# Altium PCB KNoT-Gateway Mini Starter Board.PcbDoc
Units mm, origin at the board's own origin, x right, y up, seen from the top; angles counter-clockwise.
Board outline 45.72 x 20.32 mm, 2 copper layers (Top Layer, Bottom Layer), stack 1.571 mm thick; 14 components, 16 nets, 52 pads, 8 vias.
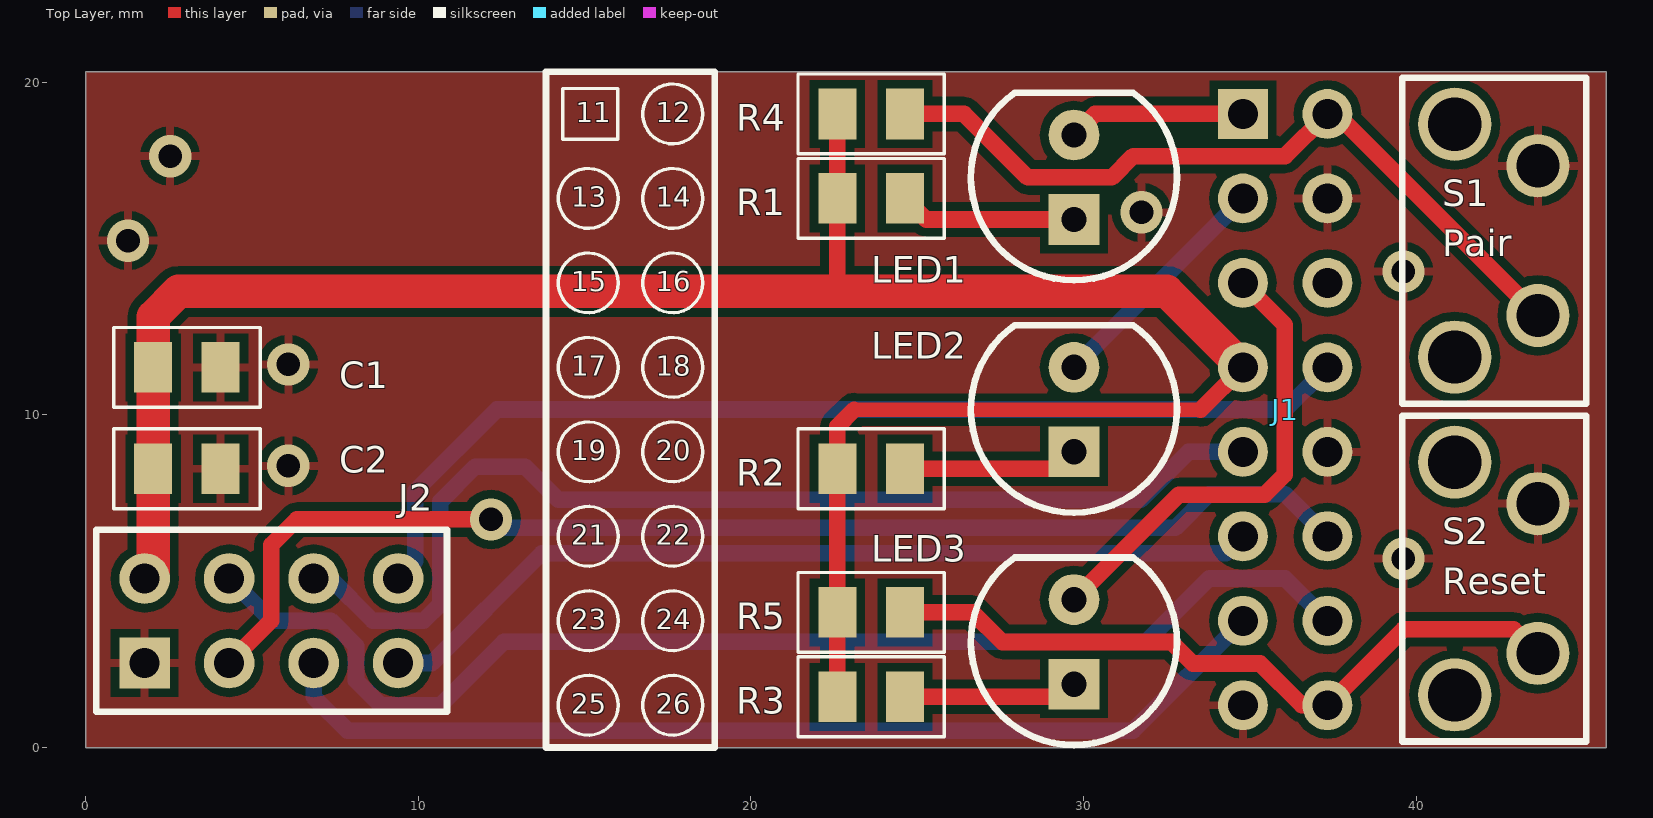
[diagram p0: Top Layer view]
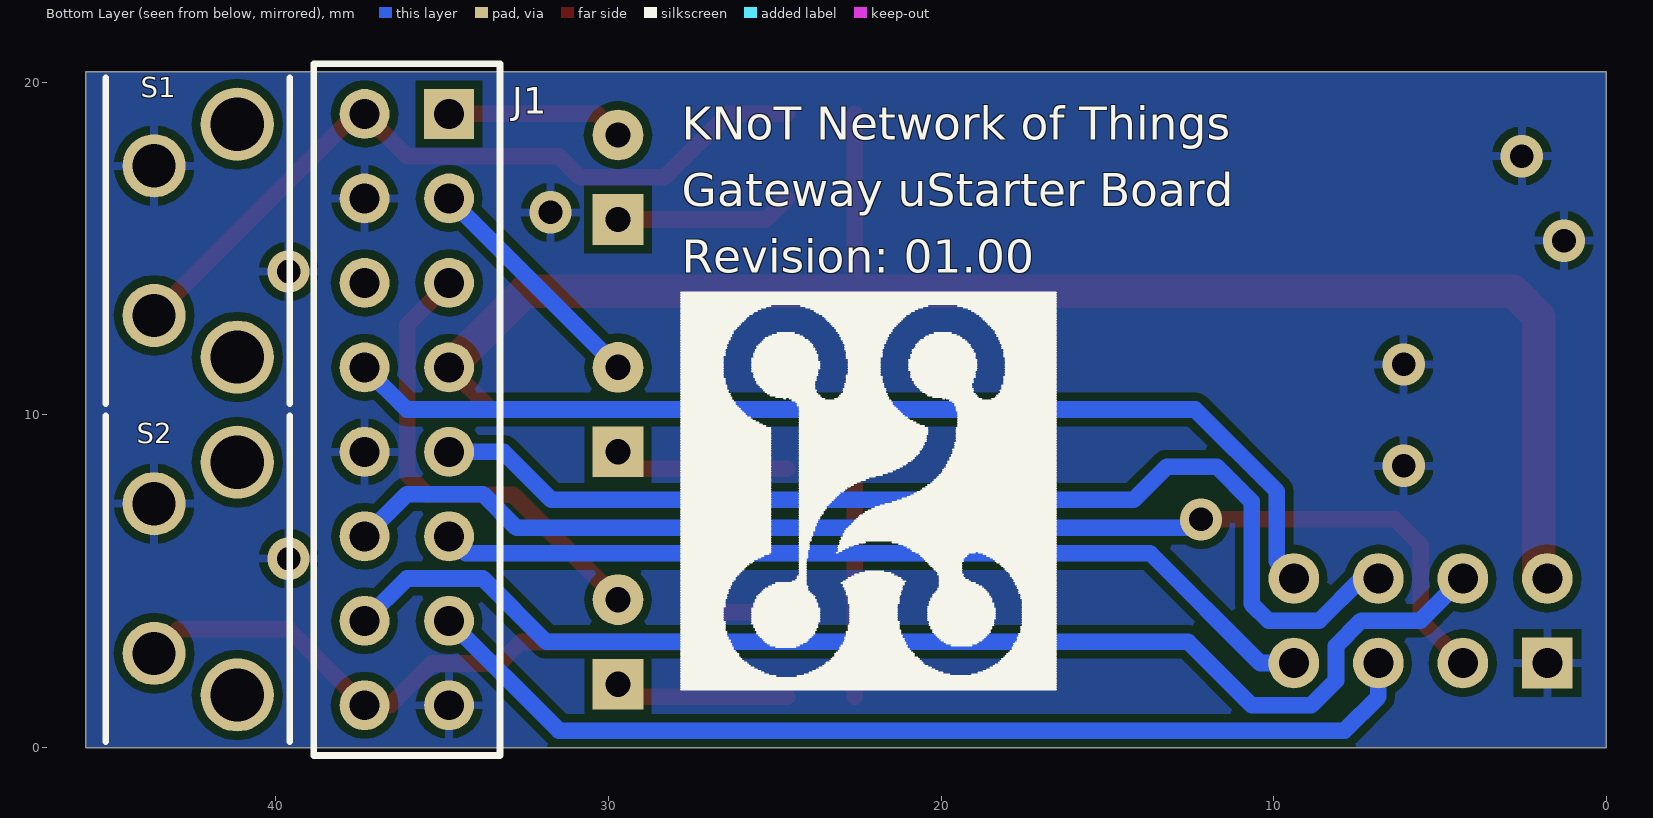
[diagram p1: Bottom Layer view, seen from below]

## Layer stack, top to bottom
Top Solder: solder mask 0.0102, Solder Resist, Dk 3.5
Top Layer: signal copper 0.0356
Dielectric 1: dielectric 1.5, FR-4, Dk 4.8
Bottom Layer: signal copper 0.0356
Bottom Solder: solder mask 0.0102, Solder Resist, Dk 3.5

## Board outline
0,0 0,20.32 45.72,20.32 45.72,0

## Design rules (kind name [scope] priority, off if disabled: settings)
Clearance [All] p1: gap=0.254
Clearance Clearance_1 [All vs (InNamedPolygon('Top Layer-GND'))] p2: gap=0.4
PolygonConnect [All] p1: connectstyle=Relief reliefconductorwidth=0.254 reliefentries=4 polygonreliefangle="90 Angle" airgapwidth=0.254
RoutingVias [All] p1: holewidth=0.711 width=1.27 viastyle="Through Hole" minholewidth=0.711 minwidth=1.27 maxholewidth=0.711 maxwidth=1.27
SMDNeckDown [All] p1: percent=90.000
SilkToSilkClearance [All] p1: silktosilkclearance=0.1
SolderMaskExpansion [All] p1: expansion=0.102
Width Width_Power [InNetClass('Power')] p1: maxlimit=1 minlimit=0.4 preferedwidth=0.5 minimp=50.000000 maximp=50.000000 favimp=50.000000
Width [All] p2: maxlimit=0.5 minlimit=0.254 preferedwidth=0.254 minimp=50.000000 maximp=50.000000 favimp=50.000000
28 further rules are at their usual default settings.

## Classes and differential pairs
net class Power: 3V3 GND

## Components (designator, comment, footprint, x,y, rotation, side; value= is the part's Value field where it differs from the comment)
C1 "Cap 0805 0.1uF" 0805_CAPS 3.044,11.43 r0 top
C2 "Cap 0805 10uF" 0805_CAPS 3.044,8.382 r0 top
J1 "Female 2x8 header" "FEMALE HEADER 2X8" 36.064,10.16 r270 top
J2 "2x4 Female Header" nRF24L01+PA+LNA 5.584,3.81 r180 top
LED1 "LED RADIAL 5MM RED" "LED RADIAL 5MM RED" 29.714,15.875 r90 top
LED2 "LED RADIAL 5MM GREEN" "LED RADIAL 5MM GREEN" 29.714,8.89 r90 top
LED3 "LED RADIAL 5MM GREEN" "LED RADIAL 5MM GREEN" 29.714,1.905 r90 top
R1 "RES_0805" 0805_RES 23.618,16.51 r180 top
R2 "RES_0805" 0805_RES 23.618,8.382 r180 top
R3 "RES_0805" 0805_RES 23.618,1.524 r180 top
R4 "RES_0805" 0805_RES 23.618,19.05 r180 top
R5 "RES_0805" 0805_RES 23.618,4.064 r180 top
S1 "Push Button - Long" "Tac Push Button L" 42.414,15.24 r270 bottom
S2 "Push Button - Short" "Tac Push Button S" 42.414,5.08 r270 bottom

## Footprints (in the part's own frame and the unit in brackets; to place one, negate y for a bottom-side part, rotate by r counter-clockwise, add the part's x,y. Pads: shape width x height; smd on the part's side, far side on the other; paste and mask are expansions set on the pad)
0805_CAPS [mil] "08'' x 05'' Passive Surface Mounted Device"
  rect 45x60 smd: 1(-40,0) 2(40,0)
  silkscreen extent -87,-47 87,47, body extent -39,-25 39,25, height 39
0805_RES [mil] "08'' x 05'' Passive Surface Mounted Device"
  rect 45x60 smd: 1(-40,0) 2(40,0)
  silkscreen extent -87,-47 87,47, body extent -45,-27 45,27, height 30
"FEMALE HEADER 2X8" [mm] "Female Header Bottom Connector 2x8"
  rect 1.5x1.5 hole 0.9: 1(-8.89,-1.27)
  round 1.5 hole 0.9: 2(-8.89,1.27) 3(-6.35,-1.27) 4(-6.35,1.27) 5(-3.81,-1.27) 6(-3.81,1.27) 7(-1.27,-1.27) 8(-1.27,1.27) 9(1.27,-1.27) 10(1.27,1.27) 11(3.81,-1.27) 12(3.81,1.27) 13(6.35,-1.27) 14(6.35,1.27) 15(8.89,-1.27) 16(8.89,1.27)
  body extent -10.16,-2.54 10.16,2.54, height 3.05
"LED RADIAL 5MM GREEN" [mil] "LED RADIAL 5MM THROUGH HOLE 100 MILS PITCH"
  rect 60x60 hole 30: 1(0,0)
  round 60 hole 30: 2(100,0)
  silkscreen extent -72,-122 150,122, body extent -68,-118 148,118, height 352
"LED RADIAL 5MM RED" [mil] "LED RADIAL 5MM THROUGH HOLE 100 MILS PITCH"
  rect 60x60 hole 30: 1(0,0)
  round 60 hole 30: 2(100,0)
  silkscreen extent -72,-122 150,122, body extent -68,-118 148,118, height 352
nRF24L01+PA+LNA [mil] "nRF24L01+PA+LNA MODULE"
  rect 60x60 hole 35.43: 1(150,50)
  round 60 hole 35.43: 2(150,-50) 3(50,50) 4(50,-50) 5(-50,50) 6(-50,-50) 7(-150,50) 8(-150,-50)
  silkscreen extent -208,-108 207,108, body extent -301,-2439 292,125
"Tac Push Button L" [mm] "Panasonic Small Tac Push Button 8.35mm"
  round 2.2 hole 1.6: 0(-3.5,1.25) 0(3.5,1.25)
  round 1.9 hole 1.3: 1(-2.25,-1.25) 2(2.25,-1.25)
  silkscreen extent -4.9,-2.7 4.9,2.83, body extent -4.06,-9.38 4.04,2.27, height 7.31
"Tac Push Button S" [mm] "Panasonic Small Tac Push Button 5.85mm"
  round 2.2 hole 1.6: 0(-3.5,1.25) 0(3.5,1.25)
  round 1.9 hole 1.3: 1(-2.25,-1.25) 2(2.25,-1.25)
  silkscreen extent -4.9,-2.7 4.9,2.83, body extent -3.94,-6.99 4.16,2.16, height 7.31

## Part data
C1: library part Cap_0805_0.1uF, "0.1µF  Ceramic Capacitor 0805"
C2: library part Cap_0805_10uF, "10uF Ceramic Capacitor 0805"
J1: library part "2x8 RPi Header", "Female Bottom 2x4 Header"
J2: library part nRF24L01+, "nRF24L01 2x4 HEADER"
LED1 LED2 LED3: "LED RADIAL"
R1 R2 R3 R4 R5: "Precision Thick Film Chip Resistor, 10 Ohm to 1M Ohm Range, 1% and 0.5% Tolerance, 0805 Size, 1/8 W"
S1: library part "Push Button L", "Tactile Push Button Right Angle"
S2: library part "Push Button S", "Tactile Push Button Right Angle"

## Via types
v1: diameter 1.27, hole 0.711, Top Layer to Bottom Layer, 8 vias

## Nets (pads, with @x,y where several pads share a name; then routed paths per layer and width w, separated by ;. In a path a pad name is that pad's centre, name@x,y a point inside that pad or via, vN(x,y) a via of type N, cw(c..) or ccw(c..) an arc to the next point about the centre after c; other vN are vias at no path point)
3V3: C1.1 C2.1 J1.7 J2.2 R1.2 R2.2 R3.2 R4.2 R5.2 | length 68.4
  Top Layer w0.45: 23.105,10.155 33.519,10.155
  Top Layer w0.5: R3.2 R5.2 22.602,9.652 23.105,10.155 ; 22.602,13.716 R1.2 R4.2 ; 33.519,10.155 J1.7
  Top Layer w1: J2.2 2.028,5.334 C2.1 C1.1 2.028,12.954 2.79,13.716 22.602,13.716 32.508,13.716 J1.7
GND: C1.2 C2.2 J1.4 J1.10 J1.15 J2.1 S1.1 S2.1
  other v1: 39.62,5.676 6.092,8.47 6.092,11.518 39.62,14.312 1.27,15.24 31.746,16.09 2.54,17.78
LED1: J1.1 LED1.2 | length 5.3
  Top Layer w0.5: LED1.2 30.349,19.05 J1.1
LED2: J1.3 LED2.2 | length 7.2
  Bottom Layer w0.5: LED2.2 J1.3
LED3: J1.5 LED3.2 | length 14.2
  Top Layer w0.5: LED3.2 32.873,7.604 35.451,7.604 36.048,8.2 36.048,12.716 J1.5
NetLED1_1: LED1.1 R1.1 | length 5.3
  Top Layer w0.5: R1.1 25.269,15.875 LED1.1
NetLED2_1: LED2.1 R2.1 | length 5.3
  Top Layer w0.5: R2.1 29.206,8.382 LED2.1
NetLED3_1: LED3.1 R3.1 | length 5.2
  Top Layer w0.5: R3.1 29.333,1.524 LED3.1
NRF_CE: J1.12 J2.3 | length 37.2
  Top Layer w0.5: J2.3 4.314,2.548 5.58,3.814 5.58,6.092 6.346,6.858 v1(12.188,6.858)
  Bottom Layer w0.5: v1(12.188,6.858) 12.442,6.604 32.762,6.604 33.778,7.62 36.064,7.62 J1.12
NRF_CLK: J1.13 J2.5 | length 30.7
  Bottom Layer w0.5: J2.5 6.854,1.524 7.87,0.508 31.492,0.508 J1.13
NRF_CSN: J1.14 J2.4 | length 37.3
  Bottom Layer w0.5: J2.4 4.322,5.08 5.588,3.814 7.37,3.814 8.128,3.056 8.128,2.016 8.869,1.274 9.39,1.274 9.394,1.27 10.664,1.27 12.573,3.179 31.877,3.179 33.778,5.08 36.064,5.08 J1.14
NRF_IRQ: J1.8 J2.8 | length 31.8
  Bottom Layer w0.5: J2.8 9.91,5.596 9.91,7.707 12.366,10.164 36.068,10.164 J1.8
NRF_MISO: J1.11 J2.7 | length 27
  Bottom Layer w0.5: J2.7 10.41,2.54 13.712,5.842 34.286,5.842 J1.11
NRF_MOSI: J1.9 J2.6 | length 33.2
  Bottom Layer w0.5: J2.6 7.362,5.08 8.632,3.81 10.156,3.81 10.664,4.318 10.664,7.395 11.714,8.445 13.214,8.445 14.214,7.445 31.714,7.445 33.159,8.89 J1.9
SW_PAIR: J1.2 R4.1 S1.2 | length 23.1
  Top Layer w0.5: R4.1 26.412,19.05 28.321,17.141 30.853,17.141 31.492,17.78 36.064,17.78 J1.2 37.604,19.05 S1.2
SW_RESET: J1.16 R5.1 S2.2 | length 21.4
  Top Layer w0.5: R5.1 26.666,4.064 27.559,3.171 32.639,3.171 33.286,2.524 35.313,2.524 36.567,1.27 J1.16 39.62,3.556 42.938,3.556 S2.2
pads on no net: J1.6 S1.0 S2.0

## Polygon pours and split planes (outlines as drawn)
GND on Top Layer "Top Layer-GND" (solid, pour order 4): 0,20.32 0,0 45.72,0 45.72,20.32
GND on Bottom Layer "Bot Layer-GND" (solid, pour order 3): 0,20.32 0,0 45.72,0 45.72,20.32

## Other copper
Top Layer:
  text "Layer Name:" at 10,-3 h0.8
  text ".Layer_Name" at 20,-3 h0.8
  text "Revision:" at 10,-5 h0.8
  text ".Revision" at 20,-5 h0.8
  text "Print Date:" at 10,-7 h0.8
  text ".Print_Date" at 20,-7 h0.8
Bottom Layer:
  text "Layer Name:" at 10,-3 h0.8
  text ".Layer_Name" at 20,-3 h0.8
  text "Revision:" at 10,-5 h0.8
  text ".Revision" at 20,-5 h0.8
  text "Print Date:" at 10,-7 h0.8
  text ".Print_Date" at 20,-7 h0.8

## Silkscreen, mask and mechanical layers (free items; w line width, h text height)
Top Overlay:
  circle w0.1: c17.649,19.05 r0.9
  circle w0.1: c17.649,16.51 r0.9
  circle w0.1: c15.109,16.51 r0.9
  circle w0.1: c15.109,13.97 r0.9
  circle w0.1: c15.109,11.43 r0.9
  circle w0.1: c15.109,8.89 r0.9
  circle w0.1: c15.109,6.35 r0.9
  circle w0.1: c15.109,1.27 r0.9
  circle w0.1: c15.109,3.81 r0.9
  circle w0.1: c17.649,1.27 r0.9
  circle w0.1: c17.649,3.81 r0.9
  circle w0.1: c17.649,6.35 r0.9
  circle w0.1: c17.649,8.89 r0.9
  circle w0.1: c17.649,11.43 r0.9
  circle w0.1: c17.649,13.97 r0.9
  lines w0.1: 14.347,18.288 14.347,18.415 14.347,19.685 14.347,19.812 15.998,19.812 15.998,19.685 15.998,18.415 15.998,18.288 14.474,18.288 14.347,18.288
  lines w0.2: 13.839,0 18.919,0 18.919,20.32 13.839,20.32 13.839,0 ; 39.587,0.18 39.587,9.98 45.114,9.98 45.114,0.18 39.587,0.18 ; 39.587,10.34 39.587,20.14 45.114,20.14 45.114,10.34 39.587,10.34
  text "11" at 14.732,18.796 h0.6
  text "12" at 17.145,18.796 h0.6
  text "S1" at 40.794,16.27 h0.8
  text "13" at 14.605,16.256 h0.6
  text "14" at 17.145,16.256 h0.6
  text "Pair" at 40.794,14.77 h0.8
  text "15" at 14.605,13.716 h0.6
  text "16" at 17.145,13.716 h0.6
  text "17" at 14.605,11.176 h0.6
  text "18" at 17.145,11.176 h0.6
  text "19" at 14.605,8.636 h0.6
  text "20" at 17.145,8.636 h0.6
  text "S2" at 40.794,6.11 h0.8
  text "21" at 14.605,6.096 h0.6
  text "22" at 17.145,6.096 h0.6
  text "Reset" at 40.794,4.61 h0.8
  text "23" at 14.605,3.556 h0.6
  text "24" at 17.145,3.556 h0.6
  text "25" at 14.605,1.016 h0.6
  text "26" at 17.145,1.016 h0.6
  text "Layer Name:" at 10,-3 h0.8
  text ".Layer_Name" at 20,-3 h0.8
  text "Revision:" at 10,-5 h0.8
  text ".Revision" at 20,-5 h0.8
  text "Print Date:" at 10,-7 h0.8
  text ".Print_Date" at 20,-7 h0.8
Bottom Overlay:
  drawing of 866 lines, arcs and shapes, not listed
  text "KNoT Network of Things" at 27.794,18.27 h1
  text "Gateway uStarter Board" at 27.794,16.27 h1
  text "Revision: 01.00" at 27.794,14.27 h1
  text "Layer Name:" at 10,-3 h0.8
  text ".Layer_Name" at 20,-3 h0.8
  text "Revision:" at 10,-5 h0.8
  text ".Revision" at 20,-5 h0.8
  text "Print Date:" at 10,-7 h0.8
  text ".Print_Date" at 20,-7 h0.8
Top Paste:
  text "Layer Name:" at 10,-3 h0.8
  text ".Layer_Name" at 20,-3 h0.8
  text "Revision:" at 10,-5 h0.8
  text ".Revision" at 20,-5 h0.8
  text "Print Date:" at 10,-7 h0.8
  text ".Print_Date" at 20,-7 h0.8
Bottom Paste:
  text "Layer Name:" at 10,-3 h0.8
  text ".Layer_Name" at 20,-3 h0.8
  text "Revision:" at 10,-5 h0.8
  text ".Revision" at 20,-5 h0.8
  text "Print Date:" at 10,-7 h0.8
  text ".Print_Date" at 20,-7 h0.8
Top Solder:
  text "Layer Name:" at 10,-3 h0.8
  text ".Layer_Name" at 20,-3 h0.8
  text "Revision:" at 10,-5 h0.8
  text ".Revision" at 20,-5 h0.8
  text "Print Date:" at 10,-7 h0.8
  text ".Print_Date" at 20,-7 h0.8
Bottom Solder:
  text "Layer Name:" at 10,-3 h0.8
  text ".Layer_Name" at 20,-3 h0.8
  text "Revision:" at 10,-5 h0.8
  text ".Revision" at 20,-5 h0.8
  text "Print Date:" at 10,-7 h0.8
  text ".Print_Date" at 20,-7 h0.8
Mechanical 1:
  the board outline again, w0.1
  text "Layer Name:" at 10,-3 h0.8
  text ".Layer_Name" at 20,-3 h0.8
  text "Revision:" at 10,-5 h0.8
  text ".Revision" at 20,-5 h0.8
  text "Print Date:" at 10,-7 h0.8
  text ".Print_Date" at 20,-7 h0.8
Mechanical 2:
  text "Layer Name:" at 10,-3 h0.8
  text ".Layer_Name" at 20,-3 h0.8
  text "Revision:" at 10,-5 h0.8
  text ".Revision" at 20,-5 h0.8
  text "Print Date:" at 10,-7 h0.8
  text ".Print_Date" at 20,-7 h0.8
Mechanical 11:
  text "Layer Name:" at 10,-3 h0.8
  text ".Layer_Name" at 20,-3 h0.8
  text "Revision:" at 10,-5 h0.8
  text ".Revision" at 20,-5 h0.8
  text "Print Date:" at 10,-7 h0.8
  text ".Print_Date" at 20,-7 h0.8
Mechanical 13:
  text "Layer Name:" at 10,-3 h0.8
  text ".Layer_Name" at 20,-3 h0.8
  text "Revision:" at 10,-5 h0.8
  text ".Revision" at 20,-5 h0.8
  text "Print Date:" at 10,-7 h0.8
  text ".Print_Date" at 20,-7 h0.8
Mechanical 15:
  text "Layer Name:" at 10,-3 h0.8
  text ".Layer_Name" at 20,-3 h0.8
  text "Revision:" at 10,-5 h0.8
  text ".Revision" at 20,-5 h0.8
  text "Print Date:" at 10,-7 h0.8
  text ".Print_Date" at 20,-7 h0.8
Drill Drawing:
  drawing of 394 lines, arcs and shapes, not listed
  text "Symbol" at 23.622,60.071 h1.83
  text "Hit Count" at 36.471,60.071 h1.83
  text "Finished Hole Size" at 54.196,60.071 h1.83
  text "Plated" at 88.374,60.071 h1.83
  text "Hole Type" at 101.223,60.071 h1.83
  text "4" at 36.471,56.261 h1.52
  text "1,300mm (51,18mil)" at 54.196,56.261 h1.52
  text "PTH" at 88.374,56.261 h1.52
  text "Round" at 101.223,56.261 h1.52
  text "4" at 36.471,52.451 h1.52
  text "1,600mm (62,99mil)" at 54.196,52.451 h1.52
  text "PTH" at 88.374,52.451 h1.52
  text "Round" at 101.223,52.451 h1.52
  text "6" at 36.471,48.641 h1.52
  text "0,762mm (30,00mil)" at 54.196,48.641 h1.52
  text "PTH" at 88.374,48.641 h1.52
  text "Round" at 101.223,48.641 h1.52
  text "8" at 36.471,44.831 h1.52
  text "0,711mm (28,00mil)" at 54.196,44.831 h1.52
  text "PTH" at 88.374,44.831 h1.52
  text "Round" at 101.223,44.831 h1.52
  text "24" at 36.471,41.021 h1.52
  text "0,900mm (35,43mil)" at 54.196,41.021 h1.52
  text "PTH" at 88.374,41.021 h1.52
  text "Round" at 101.223,41.021 h1.52
  text "46 Total" at 36.471,37.211 h1.52
  text "Layer" at 57.912,28.886 h1.52
  text "Name" at 68.324,28.886 h1.52
  text "Material" at 91.939,28.886 h1.52
  text "Thickness" at 113.777,28.886 h1.52
  text "Constant" at 130.283,28.886 h1.52
  text "Board Layer Stack" at 144.758,28.886 h1.52
  text "1" at 57.912,25.838 h1.52
  text "Top Paste" at 68.324,25.838 h1.52
  text "2" at 57.912,22.79 h1.52
  text "Top Overlay" at 68.324,22.79 h1.52
  text "3" at 57.912,19.742 h1.52
  text "Top Solder" at 68.324,19.742 h1.52
  text "Solder Resist" at 91.939,19.742 h1.52
  text "0,010mm" at 113.777,19.742 h1.52
  text "3,5" at 130.283,19.742 h1.52
  text "4" at 57.912,16.694 h1.52
  text "Top Layer" at 68.324,16.694 h1.52
  text "Copper" at 91.939,16.694 h1.52
  text "0,036mm" at 113.777,16.694 h1.52
  text "5" at 57.912,13.646 h1.52
  text "Dielectric 1" at 68.324,13.646 h1.52
  text "FR-4" at 91.939,13.646 h1.52
  text "1,500mm" at 113.777,13.646 h1.52
  text "4,8" at 130.283,13.646 h1.52
  text "6" at 57.912,10.598 h1.52
  text "Bottom Layer" at 68.324,10.598 h1.52
  text "Copper" at 91.939,10.598 h1.52
  text "0,036mm" at 113.777,10.598 h1.52
  text "7" at 57.912,7.55 h1.52
  text "Bottom Solder" at 68.324,7.55 h1.52
  text "Solder Resist" at 91.939,7.55 h1.52
  text "0,010mm" at 113.777,7.55 h1.52
  text "3,5" at 130.283,7.55 h1.52
  text "8" at 57.912,4.502 h1.52
  text "Bottom Overlay" at 68.324,4.502 h1.52
  text "9" at 57.912,1.454 h1.52
  text "Bottom Paste" at 68.324,1.454 h1.52
  text "Layer Name:" at 10,-3 h0.8
  text ".Layer_Name" at 20,-3 h0.8
  text "Revision:" at 10,-5 h0.8
  text ".Revision" at 20,-5 h0.8
  text "Print Date:" at 10,-7 h0.8
  text ".Print_Date" at 20,-7 h0.8

## Dimensions
0,20.32 to 0,0 on Mechanical 2
0,20.32 to 45.72,20.32 on Mechanical 2